# Altium PCB MCBPCB.PcbDoc (part 2 of 2)
Units mm, origin at the board's own origin, x right, y up, seen from the top; angles counter-clockwise.
Board outline 152.4 x 101.6 mm, 2 copper layers (Top Layer, Bottom Layer); 64 components, 34 nets, 224 pads, 0 vias.
Unrouted connection lines stored in the file: 144.
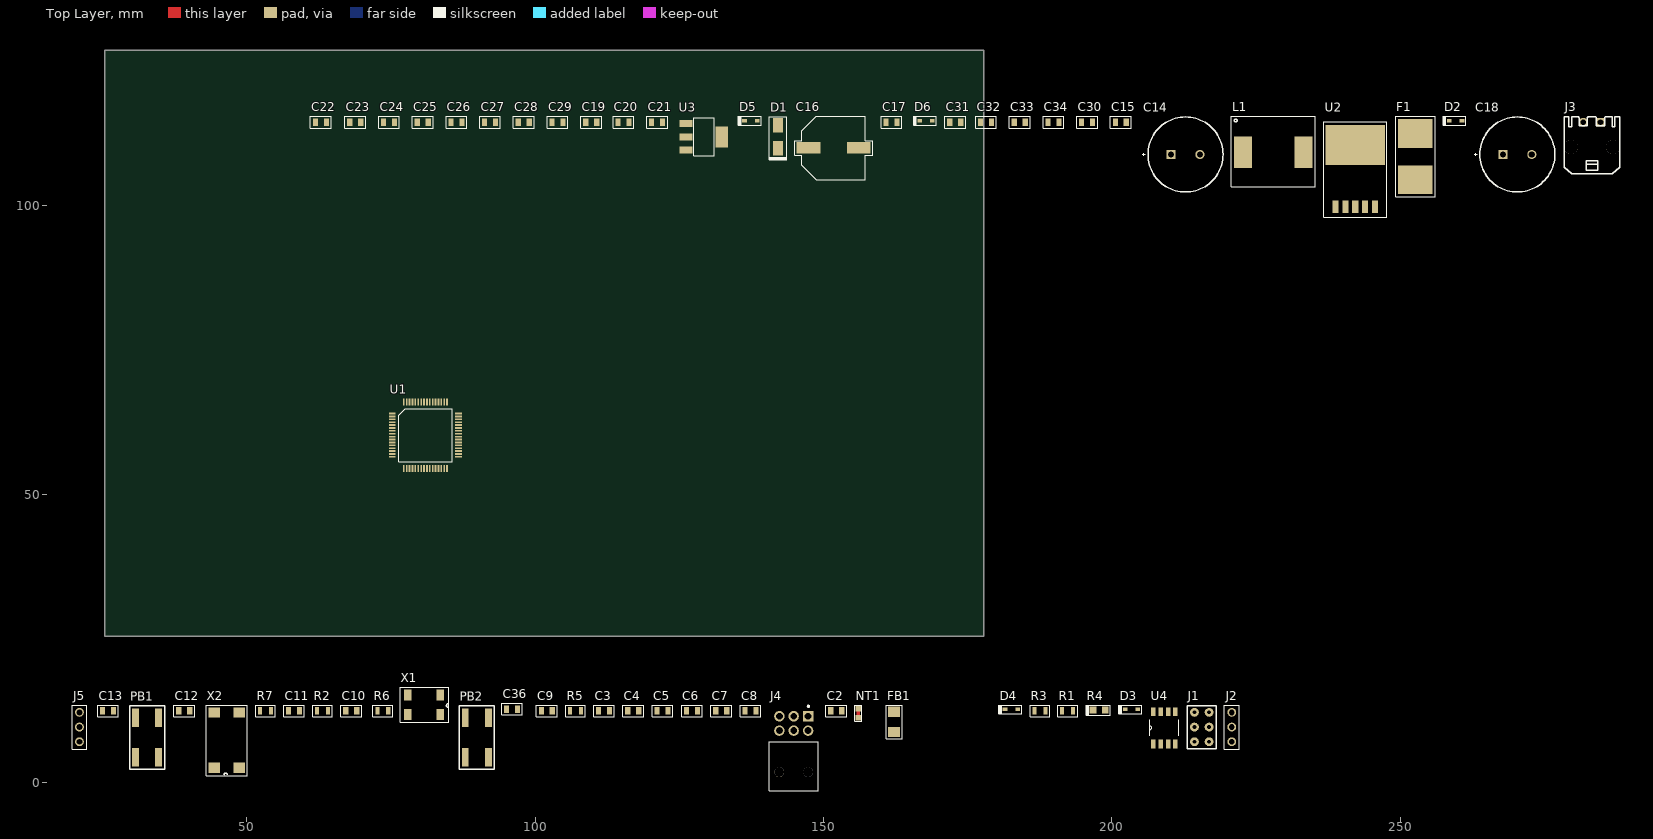
[diagram p0: Top Layer view]

## Part data (continued)
R7: library part ERJ-6ENF3000V, "RES SMD 300 OHM 1% 1/8W 0805", Case/Package=0805, Case Code (Metric)=2012, Manufacturer=Panasonic, Max Operating Temperature=155°C, Max Power Dissipation=125mW, Min Operating Temperature=-55°C, Package Quantity=1, Resistance=300R, Supplier Part Number 1=P300CCT-ND, Temperature Coefficient=100ppm/°C, Tolerance=1%, Voltage Rating=150V, Case Code (Imperial)=0805, Category=Resistors, ComponentLink1Description=https://datasheet.ciiva.com/7711/1678782-7711061.pdf?src-supplier=Element14, ComponentLink1URL=https://datasheet.ciiva.com/7711/1678782-7711061.pdf?src-supplier=Element14, ComponentLink2Description=https://datasheet.ciiva.com/9183/aoa0000ce2-9183350.pdf?src-supplier=Avnet, ComponentLink2URL=https://datasheet.ciiva.com/9183/aoa0000ce2-9183350.pdf?src-supplier=Avnet, ComponentLink3Description=https://datasheet.ciiva.com/30132/aoa0000ce2-30132023.pdf?src-supplier=Onlinecomponents.com, ComponentLink3URL=https://datasheet.ciiva.com/30132/aoa0000ce2-30132023.pdf?src-supplier=Onlinecomponents.com, ComponentLink4Description=https://datasheet.ciiva.com/17206/aoa0000ce2-17206376.pdf?src-supplier=Avnet+Europe, ComponentLink4URL=https://datasheet.ciiva.com/17206/aoa0000ce2-17206376.pdf?src-supplier=Avnet+Europe, ComponentLink5Description=https://datasheet.ciiva.com/16512/aoa0000ce2-16512233.pdf?src-supplier=Avnet+Asia, ComponentLink5URL=https://datasheet.ciiva.com/16512/aoa0000ce2-16512233.pdf?src-supplier=Avnet+Asia, ComponentLink6Description=https://datasheet.ciiva.com/22681/1678782-22681692.pdf?src-supplier=Element14, ComponentLink6URL=https://datasheet.ciiva.com/22681/1678782-22681692.pdf?src-supplier=Element14, ComponentLink7Description=https://datasheet.ciiva.com/46373/1678782-46373662.pdf?src-supplier=Element14, ComponentLink7URL=https://datasheet.ciiva.com/46373/1678782-46373662.pdf?src-supplier=Element14, ComponentLink8Description=https://datasheet.ciiva.com/46373/1678782-46373663.pdf?src-supplier=Element14, ComponentLink8URL=https://datasheet.ciiva.com/46373/1678782-46373663.pdf?src-supplier=Element14, Composition="Thick Film", Contact Plating=Tin, Depth=1.25mm, Features="Automotive AEC-Q200", Height=0.028inch, Lead Free="Lead Free", Length=2mm, Manufacturer Part Number=ERJ-6ENF3000V, Military Standard=Not, Mount="Surface Mount", Number of Terminations=2, Packaging="Tape and Reel", Power Rating=125mW, Pricing 1="1 = 0.10000, 10 = 0.08100, 100 = 0.03110, 1000 = 0.01367, 2500 = 0.01181 (USD)", Radiation Hardening=No, REACH SVHC="No SVHC", RoHS=Yes, Stock 1=271248, Supplier 1=Digi-Key, Termination=SMD/SMT, Voltage Rating (DC)=150V, Width=1.2mm
U1: "MCU 32-bit STM32F1 ARM Cortex M3 RISC 128KB Flash 2.5V/3.3V 64-Pin LQFP Tray", Case/Package=LQFP, Frequency=72MHz, Manufacturer 1=STMicroelectronics, Max Operating Temperature=105°C, Max Power Dissipation=444mW, Max Supply Voltage=3.6V, Min Operating Temperature=-40°C, Min Supply Voltage=2V, Package Quantity=160, Supplier Part Number 1=497-11526-ND, ComponentLink1Description=https://media.digikey.com/pdf/Data%20Sheets/ST%20Microelectronics%20PDFS/STM32F103x8,B.pdf?src-supplier=Digi-Key, ComponentLink1URL=https://media.digikey.com/pdf/Data%20Sheets/ST%20Microelectronics%20PDFS/STM32F103x8,B.pdf?src-supplier=Digi-Key, ComponentLink2Description=http://www.mouser.com/ds/2/389/stm32f103c8-956229.pdf?src-supplier=Mouser, ComponentLink2URL=http://www.mouser.com/ds/2/389/stm32f103c8-956229.pdf?src-supplier=Mouser, ComponentLink3Description=http://www.farnell.com/datasheets/1963088.pdf?src-supplier=Farnell, ComponentLink3URL=http://www.farnell.com/datasheets/1963088.pdf?src-supplier=Farnell, ComponentLink4Description=http://uk.rs-online.com/webdocs/0ed0/0900766b80ed015c.pdf?src-supplier=RSComponents, ComponentLink4URL=http://uk.rs-online.com/webdocs/0ed0/0900766b80ed015c.pdf?src-supplier=RSComponents, ComponentLink5Description=http://components.arrow.com/part/dataview/0323_00214153?src-supplier=Arrow+Europe, ComponentLink5URL=http://components.arrow.com/part/dataview/0323_00214153?src-supplier=Arrow+Europe, ComponentLink6Description=http://www.produktinfo.conrad.com/datenblaetter/1000000-1099999/001075570-da-01-en-MCU_32BT_64K_STM32F103RBT7_LQFP_64_STM.pdf?src-supplier=Conrad, ComponentLink6URL=http://www.produktinfo.conrad.com/datenblaetter/1000000-1099999/001075570-da-01-en-MCU_32BT_64K_STM32F103RBT7_LQFP_64_STM.pdf?src-supplier=Conrad, ComponentLink7Description=http://www.farnell.com/datasheets/1963088.pdf?src-supplier=Newark, ComponentLink7URL=http://www.farnell.com/datasheets/1963088.pdf?src-supplier=Newark, ComponentLink8Description=http://www.st.com/web/en/resource/technical/document/datasheet/CD00161566.pdf?src-supplier=Element14, ComponentLink8URL=http://www.st.com/web/en/resource/technical/document/datasheet/CD00161566.pdf?src-supplier=Element14, ComponentLink9Description=http://www.st.com/internet/com/TECHNICAL_RESOURCES/TECHNICAL_LITERATURE/DATASHEET/CD00161566.pdf?src-supplier=Avnet, ComponentLink9URL=http://www.st.com/internet/com/TECHNICAL_RESOURCES/TECHNICAL_LITERATURE/DATASHEET/CD00161566.pdf?src-supplier=Avnet, ComponentLink10Description=http://components.arrow.com/part/dataview/45775055S8555844N7728?src-supplier=Arrow, ComponentLink10URL=http://components.arrow.com/part/dataview/45775055S8555844N7728?src-supplier=Arrow, Core Architecture=ARM, Data Bus Width=32b, Height=1.45mm, Interface=I2C,SPI,USB,CAN,IrDA,UART,USART,LIN, Length=10mm, Manufacturer Part Number 1=STM32F103RBT7, Max Frequency=72MHz, Memory Size=128KB, Memory Type=FLASH, Number of ADC Channels=16, Number of I2C Channels=2, Number of I/Os=51, Number of Pins=64, Number of Programmable I/O=51, Number of SPI Channels=2, Number of Timers/Counters=4, Oscillator Type=Internal, Packaging=Tray, Peripherals="POR,PWM,WDT,DMA,Temp Sensor", Pricing 1="1=6.30000, 10=5.65500, 100=4.63300, 500=3.94400, 1000=3.32626 (USD)", Radiation Hardening=No, RAM Size=20KB, REACH SVHC="No SVHC", RoHS=Yes, Stock 1=1368, Supplier 1=Digi-Key, Watchdog Timer=Yes, Width=10mm
U2: "IC REG BUCK 5V 3A TO263-5", Supplier Part Number 1=LM2576SX-5.0/NOPBCT-ND, Supplier 1=Digi-Key
U3: "IC REG LINEAR 3.3V 800MA SOT223", Case/Package=SOT-223, Dropout Voltage=1.1V, Input Bias Current=5mA, Manufacturer 1=STMicroelectronics, Max Input Voltage=15V, Max Operating Temperature=125°C, Max Output Current=1.3A, Max Output Voltage=3.3V, Max Power Dissipation=12W, Min Input Voltage=5.3V, Min Operating Temperature=-40°C, Output Current=950mA, Output Voltage Accuracy=1%, Package Quantity=1, Quiescent Current=10mA, Supplier Part Number 1=497-1241-1-ND, Accuracy=1%, ComponentLink1Description=https://datasheet.ciiva.com/19480/1390223-19480586.pdf?src-supplier=Jameco, ComponentLink1URL=https://datasheet.ciiva.com/19480/1390223-19480586.pdf?src-supplier=Jameco, ComponentLink2Description=https://datasheet.ciiva.com/1511/1776449-1511572.pdf?src-supplier=Element14, ComponentLink2URL=https://datasheet.ciiva.com/1511/1776449-1511572.pdf?src-supplier=Element14, ComponentLink3Description=https://datasheet.ciiva.com/16392/cd00000544-16392069.pdf?src-supplier=Future+Electronics, ComponentLink3URL=https://datasheet.ciiva.com/16392/cd00000544-16392069.pdf?src-supplier=Future+Electronics, ComponentLink4Description=https://datasheet.ciiva.com/2041/cd00000544-2041932.pdf?src-supplier=Digi-Key, ComponentLink4URL=https://datasheet.ciiva.com/2041/cd00000544-2041932.pdf?src-supplier=Digi-Key, ComponentLink5Description=https://datasheet.ciiva.com/7992/1776449-7992620.pdf?src-supplier=Element14, ComponentLink5URL=https://datasheet.ciiva.com/7992/1776449-7992620.pdf?src-supplier=Element14, ComponentLink6Description=https://datasheet.ciiva.com/2041/cd00000544-2041933.pdf?src-supplier=Digi-Key, ComponentLink6URL=https://datasheet.ciiva.com/2041/cd00000544-2041933.pdf?src-supplier=Digi-Key, ComponentLink7Description=https://datasheet.ciiva.com/2041/cd00000544-2041934.pdf?src-supplier=Digi-Key, ComponentLink7URL=https://datasheet.ciiva.com/2041/cd00000544-2041934.pdf?src-supplier=Digi-Key, Contact Plating=Tin,Matte, Height=1.8mm, Lead Free="Lead Free", Length=6.5mm, Manufacturer Part Number 1=LD1117S33CTR, Max Supply Voltage=15V, Min Output Voltage=3.3V, Min Supply Voltage=3.3V, Mount="Surface Mount", Nominal Output Voltage=3.3V, Number of Outputs=1, Number of Pins=4, Number of Regulators=1, Number of Terminals=4, Output Type=Fixed, Output Voltage=3.3V, Packaging="Tape and Reel", Polarity=Positive, Power Dissipation=12W, Pricing 1="1=0.41000, 10=0.35100, 100=0.26180, 500=0.20570, 1000=0.15895 (USD)", Radiation Hardening=No, REACH SVHC="No SVHC", RoHS=Yes, Stock 1=43439, Supplier 1=Digi-Key, Termination=SMD/SMT, Weight=0.01lb, Width=3.5mm
U4: library part MCP2551-E/SN, "IC, TRANSCEIVER, CAN, SMD, 8SOIC", Case/Package=SOIC, Manufacturer=Microchip, Max Operating Temperature=125°C, Max Supply Current=75mA, Max Supply Voltage=5.5V, Min Operating Temperature=-40°C, Min Supply Voltage=4.5V, Operating Supply Voltage=5V, Package Quantity=100, Supplier Part Number 1=MCP2551-E/SN-ND, Category="Integrated Circuits (ICs)", ComponentLink1Description=http://www.microchip.com/mymicrochip/filehandler.aspx?ddocname=en011797&src-supplier=Future+Electronics, ComponentLink1URL=http://www.microchip.com/mymicrochip/filehandler.aspx?ddocname=en011797&src-supplier=Future+Electronics, ComponentLink2Description=http://www.microchip.com/mymicrochip/filehandler.aspx?ddocname=en023833&src-supplier=Digi-Key, ComponentLink2URL=http://www.microchip.com/mymicrochip/filehandler.aspx?ddocname=en023833&src-supplier=Digi-Key, ComponentLink3Description=http://www.mouser.com/ds/2/268/20001667G-1115479.pdf?src-supplier=Mouser, ComponentLink3URL=http://www.mouser.com/ds/2/268/20001667G-1115479.pdf?src-supplier=Mouser, ComponentLink4Description=https://www.distrelec.biz/Web/Downloads/_t/ds/mcp2551_eng_tds.pdf?mime=application%2Fpdf&src-supplier=Distrelec, ComponentLink4URL=https://www.distrelec.biz/Web/Downloads/_t/ds/mcp2551_eng_tds.pdf?mime=application%2Fpdf&src-supplier=Distrelec, ComponentLink5Description=http://www.farnell.com/datasheets/2299423.pdf?src-supplier=Element14, ComponentLink5URL=http://www.farnell.com/datasheets/2299423.pdf?src-supplier=Element14, ComponentLink6Description=Digikey, ComponentLink6URL=https://www.digikey.ca/product-detail/en/microchip-technology/MCP2551-E-SN/MCP2551-E-SN-ND/509446, Contact Plating=Matte,Tin, Data Rate=1Mbps, Height=0.059inch, Interface=CAN,Serial, Lead Free="Lead Free", Length=0.192inch, Logic Function=Transceiver, Manufacturer Part Number=MCP2551-E/SN, Mount="Surface Mount", Nominal Supply Current=75mA, Number of Drivers=1, Number of Pins=8, Number of Receive Buffers=1, Number of Receivers=1, Number of Transceivers=1, Number of Transmit Buffers=1, Packaging=Rail/Tube, Pricing 1="1 = 1.22000, 25 = 1.00960, 100 = 0.91670 (USD)", Radiation Hardening=No, REACH SVHC="No SVHC", RoHS=Yes, Stock 1=9215, Supplier 1=Digi-Key, Width=0.154inch
X1: library part "MC-306 32.7680K-E5", "CRYSTAL 32.7680 KHZ 6.0PF SMD", Case/Package=SMD/SMT, ESR (Equivalent Series Resistance)=65kR, Frequency=32.768kHz, Frequency Stability=20ppm, Load Capacitance=9pF, Max Operating Temperature=85°C, Min Operating Temperature=-40°C, Package Quantity=1000, Supplier Part Number 1="MC-306 32.7680K-E5: ROHS-ND", ComponentLink1Description=https://www.digikey.com/product-detail/en/epson/MC-306-32.7680K-E5-ROHS/SER4099CT-ND/6132719, ComponentLink1URL=https://www.digikey.com/product-detail/en/epson/MC-306-32.7680K-E5-ROHS/SER4099CT-ND/6132719, Depth=1.5mm, Frequency Tolerance=20ppm, Height=0.055inch, Length=6.7mm, Mount="Surface Mount", Number of Pins=4, Packaging="Tape and Reel", RoHS=Yes, Supplier 1=Digi-Key, Termination=SMD/SMT, Tolerance=20ppm, Weight=0.002116oz, Width=0.06inch
X2: library part "MA-406 8.0000M-G3", "CRYSTAL 8.00 MHZ 20.0 PF SMD", Case/Package=SMD/SMT, ESR (Equivalent Series Resistance)=65kR, Frequency=32.768kHz, Frequency Tolerance=20ppm, Load Capacitance=12.5pF, Max Operating Temperature=85°C, Min Operating Temperature=-40°C, Supplier Part Number 1=SER4286CT-ND, ComponentLink1Description=https://www.digikey.ca/en/products/detail/epson/MA-406-8-0000M-G3-ROHS/5260050, ComponentLink1URL=https://www.digikey.ca/en/products/detail/epson/MA-406-8-0000M-G3-ROHS/5260050, Height=0.055inch, Length=0.276inch, Mount="Surface Mount", Packaging="Tape and Reel", RoHS=Yes, Supplier 1=Digi-Key, Width=0.06inch

## Nets (pads, with @x,y where several pads share a name; then routed paths per layer and width w, separated by ;. In a path a pad name is that pad's centre, name@x,y a point inside that pad or via, vN(x,y) a via of type N, cw(c..) or ccw(c..) an arc to the next point about the centre after c; other vN are vias at no path point)
5V: C16.1 C17.1 C19.2 C31.2 C32.2 C33.2 C34.2 D6.2 L1.2 U2.4 U3.3
12V: C18.1 D2.2 J3.1
ACCEL_A: J4.1 U1.42
ACCEL_B: J4.2 U1.41
AGND: C2.1 NT1.0 U1.12
Boot0: J1.2 R1.2 U1.60
Boot1: J1.5 R2.2 U1.28
GND: C3.2 C4.1 C5.2 C6.2 C7.2 C9.1 C10.1 C11.1 C12.1 C13.2 C14.2 C15.2 C16.2 C17.2 C18.2 C19.1 C20.1 C21.1 C22.1 C23.1 C24.1 C25.1 C26.1 C27.1 C28.1 C29.1 C30.1 C31.1 C32.1 C33.1 C34.1 D1.2 D2.1 D3.1 D4.1 D5.1 D6.1 J1.3 J1.6 J3.2 NT1.1 PB1.1 PB1.3 PB2.1 PB2.3 R1.1 R2.1 R3.2 R6.1 R7.1 U1.18 U1.31 U1.47 U1.63 U2.3 U2.5 U3.1 U4.2
NetC9_2: C9.2 U1.3 X1.4
NetC10_2: C10.2 U1.4 X1.1
NetC11_2: C11.2 U1.6 X2.1
NetC12_2: C12.2 U1.5 X2.4
NetC14_1: C14.1 C15.1 C30.2 U2.1
NetC35_1: C36.1 R6.2 R7.2
NetD1_1: D1.1 L1.1 U2.2
NetD3_2: D3.2 R4.2 U4.7
NetD4_2: D4.2 R4.1 U4.6
NetD5_2: D5.2 F1.1
NetR3_1: R3.1 U4.8
REGEN_EN: J4.3 U1.39
REGEN_VAL: J4.4 U1.22
RTC_TAMPER: PB2.2 PB2.4 R5.1 U1.2
RVRS_EN: J4.5 U1.37
RXD: U1.44 U4.4
"SWD CLK": J2.2 U1.49
"SWD IO": J2.1 U1.46
"SWD NRST": C13.1 J2.3 PB1.2 PB1.4 U1.7
TXD: U1.45 U4.1
USART2_RTS: J5.3 U1.15
USART2_RX: J5.1 U1.17
USART2_TX: J5.2 U1.16
VDD: C3.1 C4.2 C5.1 C6.1 C7.1 C20.2 C21.2 C22.2 C23.2 C24.2 C25.2 C26.2 C27.2 C28.2 C29.2 FB1.1 J1.1 J1.4 R5.2 U1.1 U1.19 U1.32 U1.48 U1.64 U3.2 U3.4 U4.3
VDDA: C2.2 FB1.2 U1.13
WAKE: J4.6 U1.14
pads on no net: C8.1 C8.2 C36.2 F1.2 J3.None J4.None U1.8 U1.9 U1.10 U1.11 U1.20 U1.21 U1.23 U1.24 U1.25 U1.26 U1.27 U1.29 U1.30 U1.33 U1.34 U1.35 U1.36 U1.38 U1.40 U1.43 U1.50 U1.51 U1.52 U1.53 U1.54 U1.55 U1.56 U1.57 U1.58 U1.59 U1.61 U1.62 U2.6 U4.5 X1.2 X1.3 X2.2 X2.3